# EAGLE board controlboard (EAGLE 9.2.2)
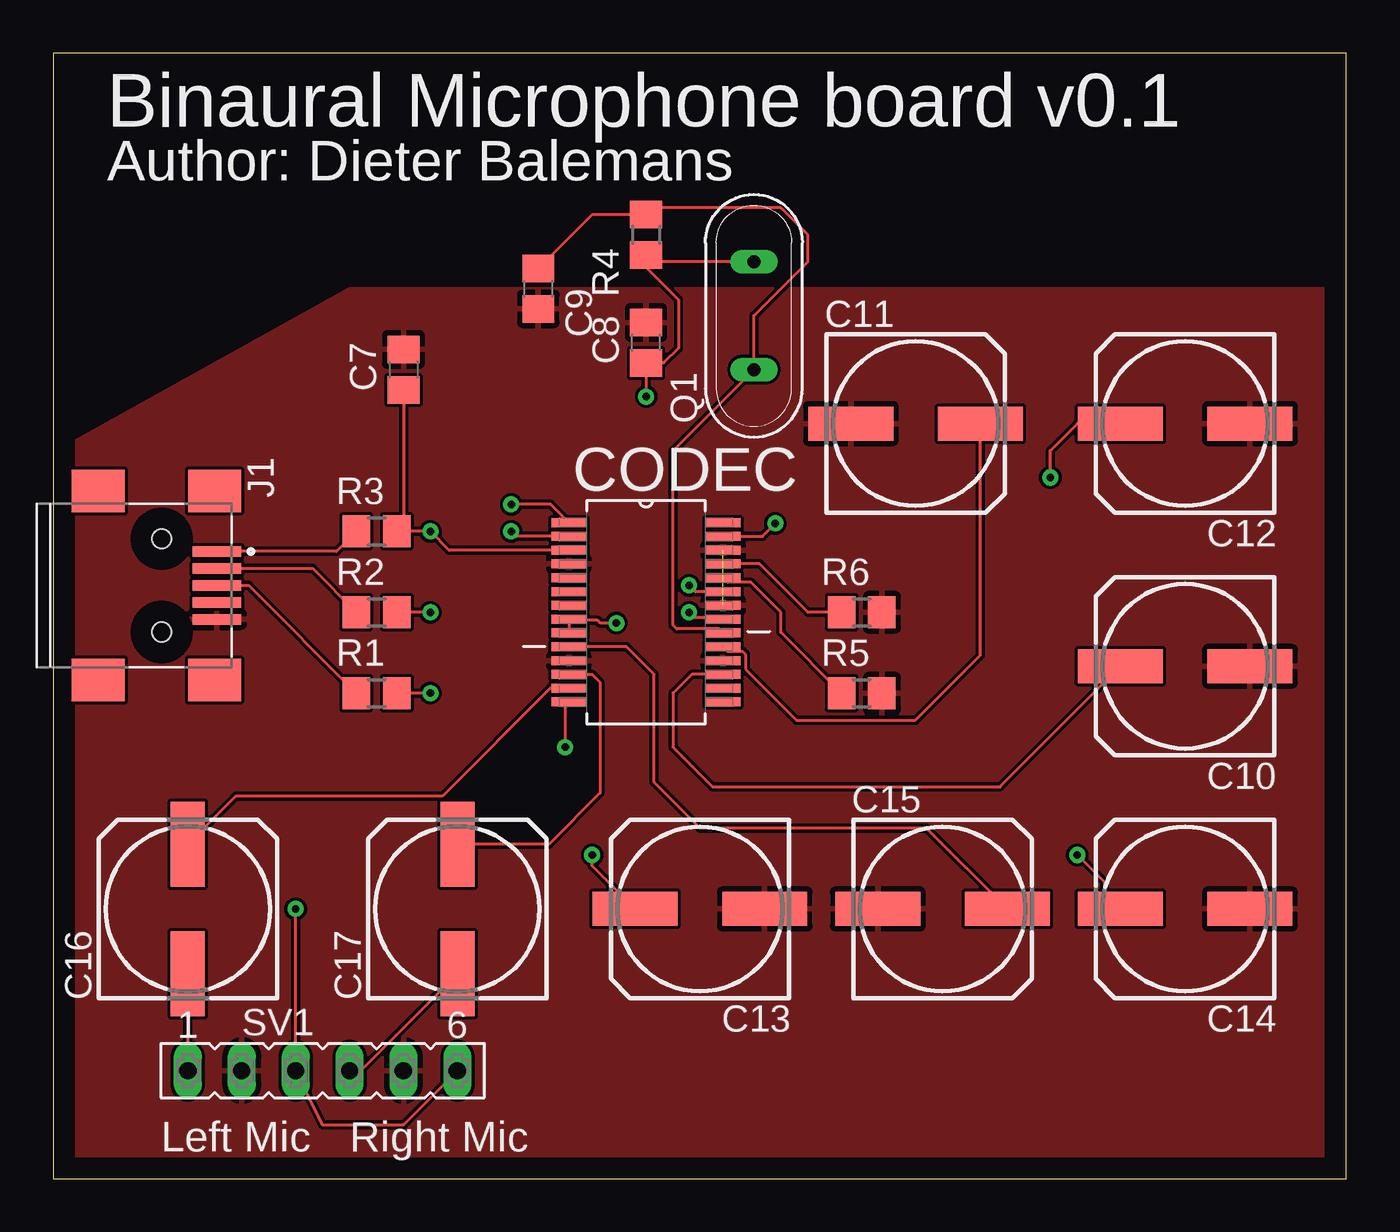
[diagram p0: board, top side]
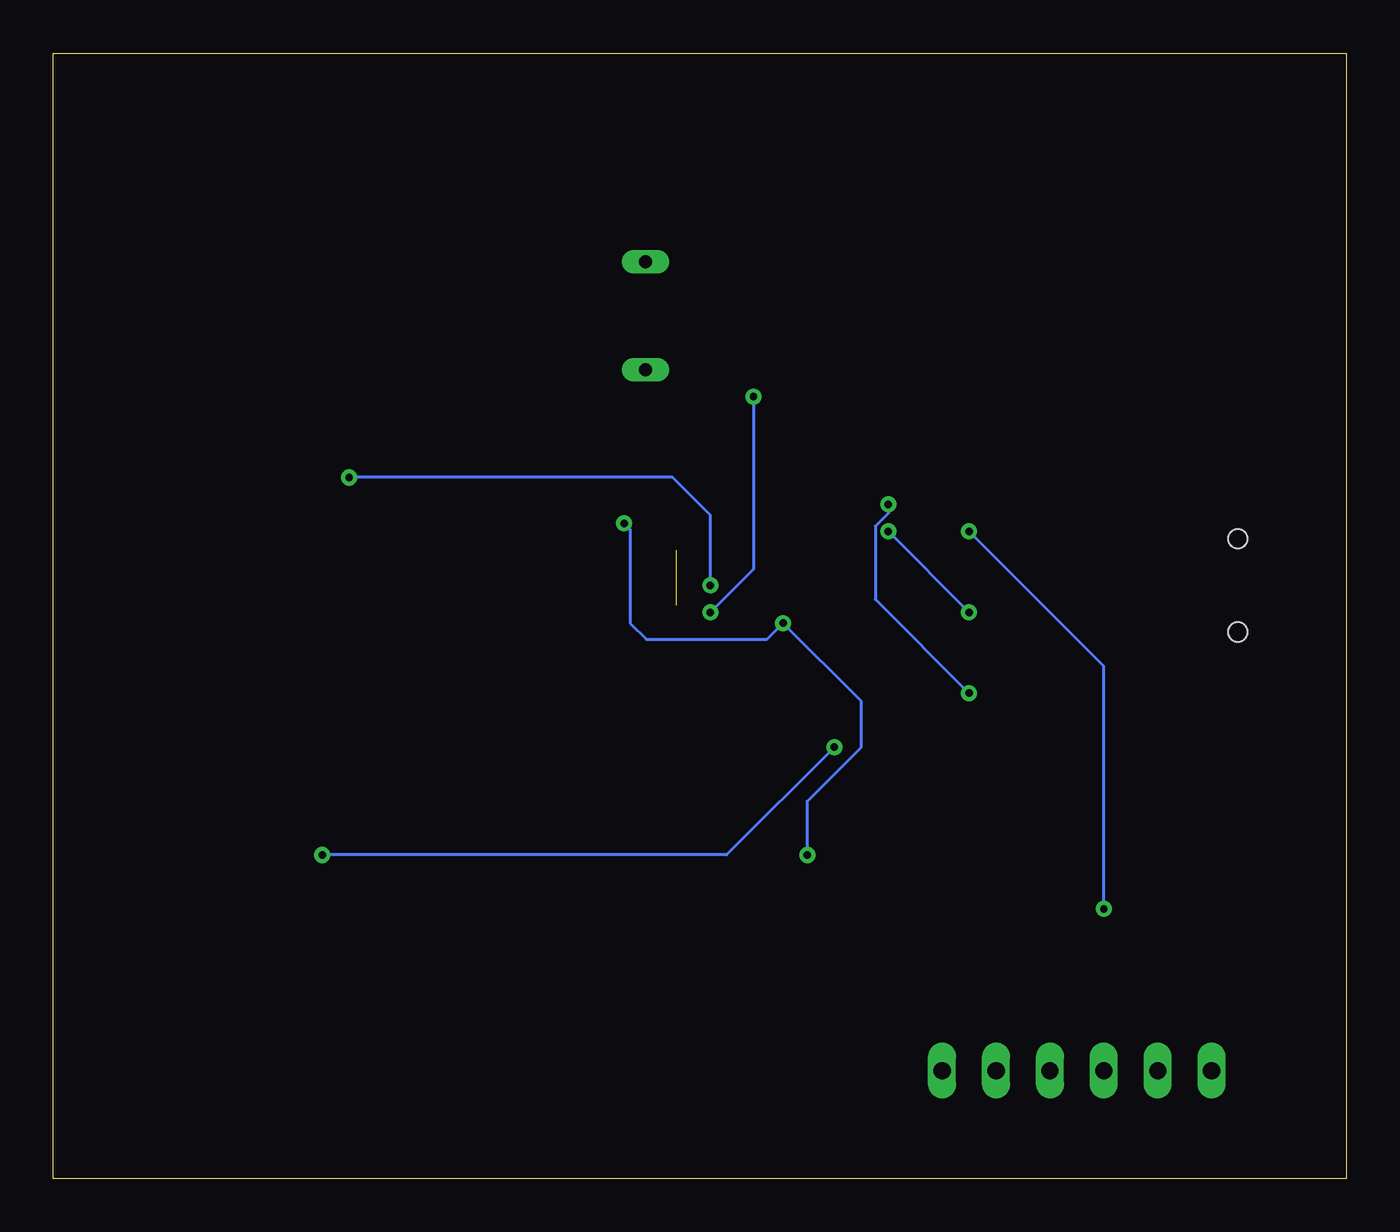
[diagram p1: board, bottom side, seen from below]

Size 60.94 x 53.01 mm. Coordinates in mm from the lower left corner, seen from the top.
Outline: 0,0 60.94,0 60.94,53.01 0,53.01 0,0
Copper layers (1*16): Top 0.035mm / dielectric 1.5mm / Bottom 0.035mm
Design rules "default": minimum track width 6mil, minimum drill 0.35mm, track to track 6mil, track to pad 6mil, pad to pad 6mil, via to via 6mil, smd to smd 6mil, copper to edge 40mil, drill to drill 6mil, minimum pad ring 10mil, minimum via ring 8mil, stop-mask expansion 4mil, vias tented up to drill 0mil, thermal gap 10mil

## Footprints (pad centres in the part's own frame; a part is rotated, then mirrored left to right if it is on the bottom)
C0805 = smd 1.3 x 1.5: 1 -0.95,0; 2 0.95,0
153CLV-0807 = smd 4 x 1.6: + 3.05,0; - -3.05,0
SOP65P780X200-28N = smd 1.651 x 0.432: 1 -3.632,4.216; 2 -3.632,3.581; 3 -3.632,2.921; 4 -3.632,2.286; 5 -3.632,1.626; 6 -3.632,0.965; 7 -3.632,0.33; 8 -3.632,-0.33; 9 -3.632,-0.965; 10 -3.632,-1.626; 11 -3.632,-2.286; 12 -3.632,-2.921; 13 -3.632,-3.581; 14 -3.632,-4.216; 15 3.632,-4.216; 16 3.632,-3.581; 17 3.632,-2.921; 18 3.632,-2.286; 19 3.632,-1.626; 20 3.632,-0.965; 21 3.632,-0.33; 22 3.632,0.33; 23 3.632,0.965; 24 3.632,1.626; 25 3.632,2.286; 26 3.632,2.921; 27 3.632,3.581; 28 3.632,4.216
TE_1734035-1 = smd 0.5 x 2.3: 1 -1.6,0.1; 2 -0.8,0.1; 3 0,0.1; 4 0.8,0.1; 5 1.6,0.1 | smd 2 x 2.5: 6 -4.45,0; 7 -4.45,-5.5; 8 4.45,-5.5; 9 4.45,0 | hole 0.9: -2.2,-2.5; 2.2,-2.5
QS = drill 0.61 long: 1 -2.54,0; 2 2.54,0
R0805 = smd 1.3 x 1.5: 1 -0.95,0; 2 0.95,0
FE06 = drill 0.813 long: 1 -6.35,0; 2 -3.81,0; 3 -1.27,0; 4 1.27,0; 5 3.81,0; 6 6.35,0

## Placement (x,y rotation side)
C7  1µ  [C0805]  16.51,38.1 270 top
C8  33p  [C0805]  27.94,39.37 90 top
C9  33p  [C0805]  22.86,41.91 270 top
C10  1µ  [153CLV-0807]  53.34,24.13 180 top
C11  1µ  [153CLV-0807]  40.64,35.56 0 top
C12  1µ  [153CLV-0807]  53.34,35.56 180 top
C13  1µ  [153CLV-0807]  30.48,12.7 180 top
C14  10µ  [153CLV-0807]  53.34,12.7 180 top
C15  10µ  [153CLV-0807]  41.91,12.7 0 top
C16  10µ  [153CLV-0807]  6.35,12.7 90 top
C17  10µ  [153CLV-0807]  19.05,12.7 90 top
CODEC  PCM2906C  [SOP65P780X200-28N]  27.94,26.67 0 top
J1  1734035-1  [TE_1734035-1]  7.62,27.94 270 top
Q1  12MHz  [QS]  33.02,40.64 90 top
R1  22  [R0805]  15.24,22.86 0 top
R2  22  [R0805]  15.24,26.67 0 top
R3  2.2  [R0805]  15.24,30.48 0 top
R4  1M  [R0805]  27.94,44.45 270 top
R5  500k  [R0805]  38.1,22.86 0 top
R6  500k  [R0805]  38.1,26.67 0 top
SV1  [FE06]  12.7,5.08 0 top

## Library data of the parts
C7-C9 = rcl; SPICEPREFIX: C
C10-C17 = resistor
CODEC = PCM2906C_custom
J1 = 1734035-1; AVAILABILITY: Unavailable; CENTERLINE_PITCH: .8 mm[.031 in]; COMMENT: 1734035-1; DESCRIPTION: Mini USB,R/A,SMT,B Type,pbFree; EU_ROHS_COMPLIANCE: Compliant; LINK: http://www.te.com/usa-en/product-1734035-1.html; MF: TE Connectivity; MP: 1734035-1; NUMBER_OF_POSITIONS: 5; PACKAGE: None; PRICE: None; PRODUCT_TYPE: Connector
Q1 = special
R1-R6 = rcl; SPICEPREFIX: R
SV1 = con-lsta; OC_FARNELL: unknown; OC_NEWARK: unknown

## Nets
D+: J1.3 R1.1
D-: J1.2 R2.1
GND: C7.1 C8.2 C9.2 C10.- C11.- C12.- C13.- C14.- C15.- CODEC.4 CODEC.11 CODEC.18 CODEC.22 CODEC.26 J1.5 R5.2 R6.2 SV1.2 SV1.5
N$1: CODEC.1 R1.2
N$2: CODEC.2 R2.2
N$3: J1.1 R3.1
N$4: C11.+ CODEC.19
N$5: C9.1 CODEC.20 Q1.1 R4.1
N$6: C8.1 CODEC.21 Q1.2 R4.2
N$7: C10.+ CODEC.17
N$8: C12.+ CODEC.23
N$9: CODEC.25 R6.1
N$10: CODEC.24 R5.1
N$12: C15.+ CODEC.10
N$13: C14.+ CODEC.14
N$14: CODEC.28
N$15: C13.+ CODEC.8 CODEC.9 CODEC.27
N$17: C17.+ CODEC.12
N$18: C16.+ CODEC.13
VBUS: C7.2 CODEC.3 R3.2 SV1.3 SV1.6
VINL: C17.- SV1.4
VINR: C16.- SV1.1

## Tracks (layer width: path | path; a pad name or v marks a point on that pad's centre or on a via)
D+
  Top 0.152: J1.3 9.21,27.94 R1.1
D-
  Top 0.152: J1.2 12.22,28.74 R2.1
GND  (1 unrouted)
  pour Top: -3.81,-5.08 67.31,-5.08 66,41.91 13.97,41.91 -3.81,32.03
N$1  (via drill 0.35)
  Top 0.152: CODEC.1 23.44,31.75 v21.59,31.75 | v17.78,22.86 R1.2
  Bottom 0.152: v21.59,31.75 21.59,31.34 22.2,30.73 22.2,27.28 v17.78,22.86
N$2  (via drill 0.35)
  Top 0.152: CODEC.2 21.82,30.25 v21.59,30.48 | v17.78,26.67 R2.2
  Bottom 0.152: v21.59,30.48 v17.78,26.67
N$3
  Top 0.152: R3.1 13.35,29.54 J1.1
N$4
  Top 0.152: CODEC.19 31.79,24.83 32.49,24.83 32.63,24.7 32.63,23.99 35.03,21.59 40.64,21.59 43.69,24.64 C11.+
N$5
  Top 0.152: C9.1 25.4,45.4 R4.1 28.26,45.72 34.29,45.72 35.56,44.45 35.56,43.18 33.02,40.64 Q1.1 29.21,34.29 29.21,26.07 29.38,25.89 31.38,25.89 CODEC.20
N$6  (via drill 0.35)
  Top 0.152: Q1.2 28.26,43.18 R4.2 27.94,42.93 29.46,41.4 29.46,39.12 28.77,38.42 C8.1 v27.94,36.83 | CODEC.21 31.5,26.42 30.23,26.42 v29.97,26.67
  Bottom 0.152: v27.94,36.83 27.94,28.7 v29.97,26.67
N$7
  Top 0.152: CODEC.17 30.1,23.75 29.21,22.86 29.21,20.32 31.08,18.45 44.61,18.45 C10.+
N$8  (via drill 0.35)
  Top 0.152: CODEC.23 30.28,27.64 v29.97,27.94 | v46.99,33.02 46.99,34.29 48.26,35.56 C12.+
  Bottom 0.152: v29.97,27.94 29.97,31.24 31.75,33.02 v46.99,33.02
N$9
  Top 0.152: R6.1 35.56,26.67 33.27,28.96 CODEC.25
N$10
  Top 0.152: R5.1 34.29,25.72 34.29,26.67 32.88,28.08 31.79,28.08 CODEC.24
N$12
  Top 0.152: C15.+ 41.15,16.51 30.48,16.51 28.32,18.67 28.32,23.75 27.03,25.04 CODEC.10
N$13  (via drill 0.35)
  Top 0.152: CODEC.14 24.13,22.28 v24.13,20.32 | v48.26,15.24 49.53,13.97 49.53,12.7 C14.+
  Bottom 0.152: v24.13,20.32 29.21,15.24 v48.26,15.24
N$15  (via drill 0.35)
  Top 0.152: CODEC.8 24.31,26.29 | 24.31,26.29 CODEC.9 | CODEC.27 33.43,30.25 v34.04,30.86 | v26.54,26.16 25.78,26.16 25.65,26.29 24.31,26.29 | C13.+ 25.4,14.73 v25.4,15.24
  Bottom 0.152: v34.04,30.86 33.75,30.58 33.75,26.16 32.99,25.4 27.3,25.4 v26.54,26.16 22.86,22.48 22.86,20.32 25.4,17.78 v25.4,15.24
N$17
  Top 0.152: CODEC.12 25.4,23.75 25.78,23.37 25.78,18.16 23.37,15.75 C17.+
N$18
  Top 0.152: CODEC.13 23.43,23.09 18.35,18.02 8.62,18.02 C16.+
VBUS  (via drill 0.35)
  Top 0.152: v11.43,12.7 SV1.3 12.7,2.54 16.51,2.54 SV1.6 | 16.51,30.48 v17.78,30.48 18.67,29.59 CODEC.3 | 16.51,30.48 R3.2 | C7.2 16.51,30.48
  Bottom 0.152: v11.43,12.7 11.43,24.13 v17.78,30.48
VINL
  Top 0.152: C17.- 14.48,5.08 SV1.4
VINR
  Top 0.152: C16.- SV1.1

## Text on the board
tNames: Binaural Microphone board v0.1 | Author: Dieter Balemans | Left Mic | Right Mic